# Altium PCB IMX6WBED.PcbDoc (part 6 of 10)
Units mil, origin at the board's own origin, x right, y up, seen from the top; angles counter-clockwise.
Board outline 3318.23 x 4815.16 mil, 6 copper layers (Top Layer, L2_GND_1, L3_INT_1, L6_INT_2, L7_PWR_2, Bottom Layer), stack 27.7 mil thick; 504 components, 400 nets, 2357 pads, 1199 vias.
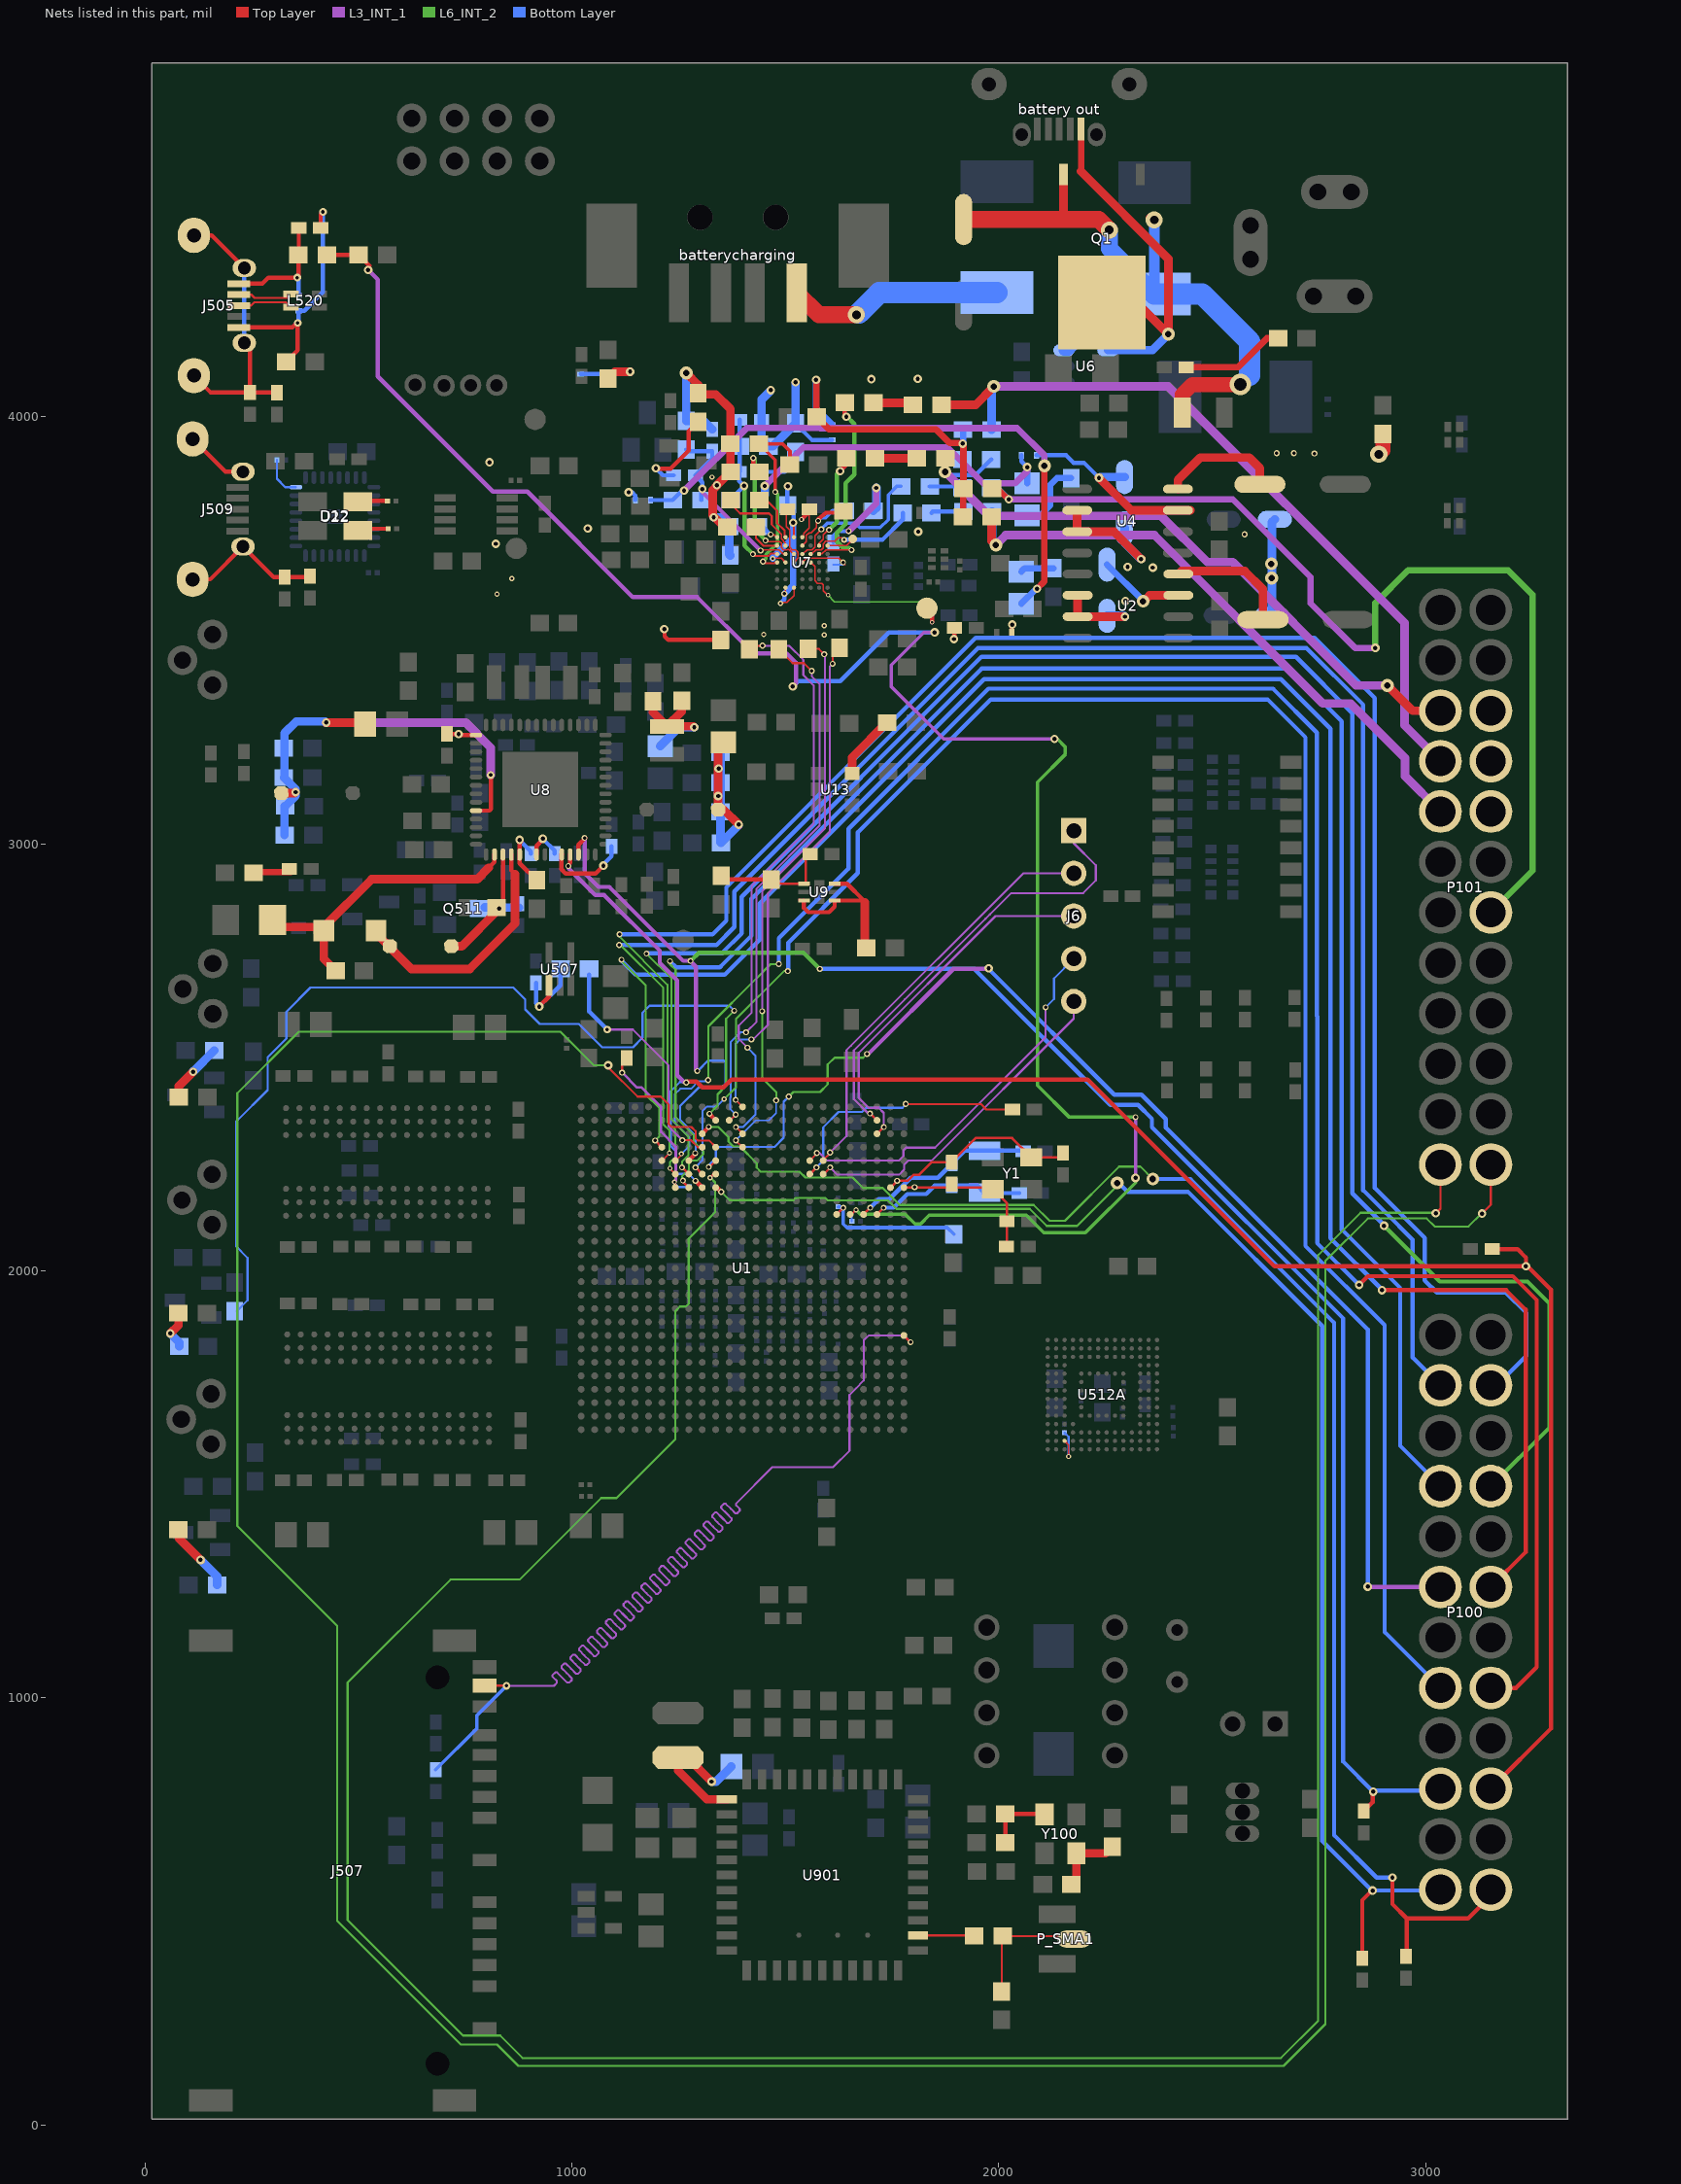
[diagram p10: the nets of this part, all layers, seen from the top]

## Via types
v1: diameter 14, hole 8, Top Layer to Bottom Layer, 296 vias
v2: diameter 14, hole 8, Top Layer to Bottom Layer, tented both sides, 244 vias
v3: diameter 20, hole 10, Top Layer to Bottom Layer, 221 vias
v4: diameter 20, hole 10, Top Layer to Bottom Layer, tented both sides, 112 vias
v5: diameter 18, hole 8, Top Layer to Bottom Layer, tented both sides, 74 vias
v6: diameter 12, hole 6, Top Layer to Bottom Layer, tented both sides, 60 vias
v7: diameter 16, hole 8, Top Layer to Bottom Layer, 59 vias
v8: diameter 30, hole 15, Top Layer to Bottom Layer, 33 vias
v9: diameter 40, hole 20, Top Layer to Bottom Layer, 16 vias
v10: diameter 30, hole 15, Top Layer to Bottom Layer, tented both sides, 16 vias
v11: diameter 18, hole 8, Top Layer to Bottom Layer, 16 vias
v12: diameter 12, hole 6, Top Layer to Bottom Layer, 13 vias
v13: diameter 16, hole 8, Top Layer to Bottom Layer, tented both sides, 8 vias
v14: diameter 80, hole 40, Top Layer to Bottom Layer, 5 vias
v15: diameter 14, hole 6, Top Layer to Bottom Layer, tented both sides, 4 vias
v16: diameter 50, hole 30, Top Layer to Bottom Layer, 3 vias
v17: diameter 16, hole 10, Top Layer to Bottom Layer, 3 vias
v18: diameter 25, hole 15, Top Layer to Bottom Layer, tented both sides, 3 vias
v19: diameter 35, hole 20, Top Layer to Bottom Layer, tented both sides, 3 vias
v20: diameter 10, hole 6, Top Layer to Bottom Layer, 3 vias
v21: diameter 18, hole 10, Top Layer to Bottom Layer, tented both sides, 2 vias
v22: diameter 80, hole 45, Top Layer to Bottom Layer, 1 vias
v23: diameter 40, hole 20, Top Layer to Bottom Layer, tented both sides, 1 vias
v24: diameter 11, hole 6, Top Layer to Bottom Layer, tented both sides, 1 vias
v25: diameter 13, hole 6, Top Layer to Bottom Layer, tented both sides, 1 vias
v26: diameter 14, hole 6, Top Layer to Bottom Layer, 1 vias

## Nets (pads, with @x,y where several pads share a name; then routed paths per layer and width w, separated by ;. In a path a pad name is that pad's centre, name@x,y a point inside that pad or via, vN(x,y) a via of type N, cw(c..) or ccw(c..) an arc to the next point about the centre after c; other vN are vias at no path point) (continued)
GND_ANALOG: C3.2 C4.2 C7.2 C8.2 C15.1 C17.1 C540.1 C541.1 C542.1 C543.1 C547.2 C548.2 C549.1 C640.1 L501.2 P101.6 P101.8 P101.10 R525.1 R529.1 R541.1 R542.1 R545.1 R552.1 R554.1 SHA7.2 TVS500.1 TVS501.1 TVS502.1 TVS503.1 TVS505.1 U2.7 U4.7 U7.B1 U7.B4 U7.C1 U7.C7 U7.D7 | length 3417.2
  Top Layer w3: v12@1469.91,3668.78 1490.31,3668.78 U7.B4@1500.15,3658.94 ; v12@1490.29,3565.04 1503.6,3565.04 1519.83,3581.27 U7.C1@1519.83,3599.9 ; v1@1499.91,3583.24 1500.15,3583.48 U7.B1@1500.15,3599.9 ; U7.D7@1539.51,3717.98 1542.47,3720.94 1542.47,3727.38 1554.99,3739.9 1554.99,3781.83 C640.1@1556.06,3782.9
  Top Layer w5: v4@1519.73,3744.84 1519.41,3744.52 1519.41,3736.96 1519.47,3736.9 1519.47,3718.34 U7.C7@1519.83,3717.98
  Top Layer w10: v3@1217.06,3501.71 1217.06,3485.8 1225.42,3477.44 C541.1@1348.47,3477.44 ; v6@1539.23,3759.47 v6(1537.31,3759.47) 1556.06,3778.22 C640.1@1556.06,3782.9 C640.1@1556.28,3782.68 ; v3@1895.66,3482.55 1895.88,3482.77 R554.1@1895.88,3505.9 ; TVS502.1@2030.47,3494.9 2030.47,3509.96 v3@2030.84,3510.33
  Top Layer w20: SHA7.2@1084.47,4089.44 1100.74,4105.71 v3@1135.28,4105.71 ; v8(1267.75,4102.44) 1295.47,4074.72 R552.1@1295.47,4055.36 1298.17,4052.66 1336.35,4052.66 1371.01,4018 C549.1@1371.01,3936.9 C17.1@1371.01,3871.9 ; v3@1329.64,3769.21 1329.64,3828.42 v3@1339.41,3838.19 ; v3@1333.16,3765.69 1356.95,3741.9 C547.2@1364.01,3741.9 ; v3@1339.4,3839.49 1371.01,3871.09 C17.1@1371.01,3871.9 ; C17.1@1372.01,3870.9 C17.1@1371.01,3871.9 ; v3(2234.53,3857.09) 2310.72,3780.9 U4.7@2419.47,3780.9 U4.7@2448.41,3780.9 ; v8@2339.73,3568.61 2353.02,3581.9 U2.7@2420.47,3581.9 2364.76,3581.9
  Top Layer w35: v9(2890.07,3912.16) 2899.47,3921.56 L501.2@2899.47,3959.44
  L3_INT_1 w15: v1(1648.27,3732.35) 1712.66,3796.74 v3(1712.66,3833.43)
  Bottom Layer w10: TVS505.1@1020.47,4099.9 1130.4,4099.9 v3(1136.21,4105.71) ; v3@1140.06,3823.76 1148.47,3815.35 TVS501.1@1148.47,3804.9 ; v12(1488.59,3563.12) 1497.41,3571.94 v1(1497.41,3585.61) ; v3@1504.35,3837.41 1504.01,3837.07 C543.1@1504.01,3793.9 1518.81,3779.1 v4@1518.81,3746.01 ; R525.1@1523.47,3984.36 1561.93,3945.9 TVS503.1@1609.47,3945.9 ; C540.1@1612.47,3706.49 1612.47,3720.81 1623.78,3732.12 v1@1647.89,3732.12 ; TVS500.1@2088.47,3909.9 2157.43,3909.9 2174.95,3892.38 2199.24,3892.38 v3(2234.53,3857.09) ; v3@2236.91,3858.52 v3@2237.29,3858.9
  Bottom Layer w15: v12(1469.91,3668.18) 1469.91,3669.61 1518,3717.7 v4(1518,3751.94) ; v1(1497.41,3585.61) 1518,3606.2 1518,3716.27 ; C4.2@2253.47,3653.9 2337.9,3569.47 v8(2337.9,3567.99)
  Bottom Layer w20: v8@1267.47,4097.47 R545.1@1267.47,3990.36 1308.6,3990.36 R541.1@1328.47,3970.49 ; v3(1331.95,3764.48) 1346.43,3764.48 C548.2@1368.01,3742.9 1368.01,3677.83 C542.1@1370.47,3675.36 ; v3@1464.41,4060.73 1444.06,4040.38 R542.1@1444.06,3992.9 1444.06,3946.77 R529.1@1459.93,3930.9 1470.01,3930.9 R525.1@1523.47,3984.36 1523.47,4078 v3@1523.52,4078.05 ; C15.1@1705.93,3779.9 1713,3786.97 v3@1713,3833.77 ; v3@2237.29,3858.9 C8.2@2294.47,3858.9 ; C3.2@2639.47,3534.9 2639.47,3752.9 C7.2@2646.47,3759.9
  other v1: 2575.62,3724.58 2739.35,3913.9 2651.01,3914.77 2691.24,3914.77
  other v3: 1894.96,3479.36 1216.03,3502.73 2031.09,3513.33 2296.73,3568.4 2360.6,3646.68 2301.62,3648.69 821.34,3702.53 1811.16,3730.95 1036.88,3738.13 1132.6,3823.07 1505.73,3837.63 1339.18,3839.71 806.51,3893.51 1465.43,4062.43 1523.86,4080.77 1701.23,4088.08 1809.9,4088.75
  other v8: 2639.27,3622.12 2638.35,3655.72
  other v12: 1591.02,3489.02 1449.13,3490.01 1590.6,3511 824.33,3584.48 859.28,3621.01 1328.04,3858.67
GREEN: R307.2 U1.R2 | length 2282.9
  Top Layer w10: v2(1321.97,2367.76) 1321.17,2367.76 U1.R2@1336.53,2352.4
  L6_INT_2 w5: v2@1321.17,2367.76 v2(1321.97,2367.76) 1340.86,2386.65 1340.86,2413.08 1360.99,2433.21 1360.99,2590.08 v1(1379.95,2609.04)
  Bottom Layer w5: R307.2@214.47,1905.44 239.75,1930.72 239.75,2030.3 213.51,2056.54 213.51,2349.96 286.94,2423.39 286.94,2500.15 330.8,2544.01 330.8,2606.61 387.42,2663.23 862.44,2663.23 890.41,2635.26 890.41,2612.03 924.63,2577.81 1016.21,2577.81 1070.54,2523.48 1142.89,2523.48 1165.37,2545.96 1165.37,2604.09 1181.86,2620.58 1368.41,2620.58 v1(1379.95,2609.04)
HPOUTL: C534.2 L505.1 R541.2 R545.2 U7.B5 | length 455.3
  Top Layer w3: v1@1442.32,3688.09 1476.5,3688.09 1484.69,3688.12 ; 1484.77,3688.21 1494.36,3678.62 U7.B5@1500.15,3678.62
  L3_INT_1 w10: v3@1305.74,3822.94 v1(1441.84,3686.84)
  Bottom Layer w10: R545.2@1267.47,3923.44 1271.6,3919.31 R541.2@1328.47,3919.31 1328.47,3902.31 C534.2@1289.06,3862.9 1305.27,3846.69 v3(1305.27,3830.87) 1302.93,3828.53 L505.1@1302.93,3804.9
HPOUTR: C519.2 L504.1 R529.2 R542.2 U7.A5 | length 432.4
  Top Layer w4.7: v1@1425.03,3677.65 1424.85,3677.47 1427.83,3674.49 1460.17,3674.49 1465.21,3679.53 1479.56,3679.53 U7.A5@1480.47,3678.62
  L6_INT_2 w10: v3@1402.68,3836.43 1403.87,3835.24 1403.87,3698.68 v1(1424.04,3678.51)
  Bottom Layer w10: L504.1@1372.01,3804.9 1372.01,3806.85 v3(1403.25,3838.09) 1391.88,3849.46 C519.2@1391.88,3870.9 1392.88,3871.9 R542.2@1392.88,3992.9
HX1_CLK: P100.4 U1.V6 | length 4685.6
  Top Layer w4.5: v6@1228.47,2238.9 1240.95,2226.42 U1.V6@1242.04,2226.42
  L6_INT_2 w4.7: v2(1111.47,2787.9) 1111.47,2781.9 1223.47,2669.9 1223.47,2348.9 1242.47,2329.9 1242.47,2266.9 1229.47,2253.9 v6(1229.47,2239.9)
  Bottom Layer w10: v2(1111.47,2787.9) 1329.47,2787.9 1361.47,2819.9 1361.47,2897.9 1945.57,3482 2402.77,3482 ; 2398.29,3482.58 2398.43,3482.44 2739.19,3482.44 2880.76,3340.87 2880.76,2194.05 2997.82,2076.99 2997.82,1977.29 3026.06,1949.05 3187.72,1949.05 3235.87,1900.9 3235.87,1801.1 3166.56,1731.79 P100.4@3152.58,1731.79
HX1_DATA: P100.3 U1.W5 | length 4368.4
  Top Layer w4.5: U1.W5@1210.54,2257.92 1210.54,2257.97 v6(1228.47,2275.9)
  L6_INT_2 w4.7: v2(1110.47,2762.9) 1113.47,2762.9 1214.01,2662.36 1214.01,2342.36 1228.47,2327.9 v6(1228.47,2275.9)
  Bottom Layer w10: v2@1114.47,2762.9 1338.47,2762.9 1380.47,2804.9 1380.47,2887.9 1951.09,3458.52 2720.58,3458.52 2853.46,3325.64 2853.46,2188.54 2903.57,2138.43 ; 2907.67,2134.33 2903.57,2138.43 ; P100.3@3034.47,1731.79 2969.28,1796.98 2969.28,2072.72 2903.57,2138.43
HX2_CLK: P100.8 U1.U6 | length 4788
  Top Layer w6: v2(1257.79,2242.17) U1.U6@1273.53,2226.42
  L6_INT_2 w4.7: v2(1174.47,2742.9) 1233.33,2684.04 1233.33,2354.04 1272.47,2314.9 1272.47,2269.9 1257.79,2255.22 v2(1257.79,2242.17)
  L6_INT_2 w10: v3(2902.43,2105.37) 3033.11,1974.69 3238.27,1974.69 3289.47,1923.49 3289.47,1632.46 P100.8@3152.58,1495.57
  Bottom Layer w10: v2@1176.47,2743.9 1351.47,2743.9 1397.47,2789.9 1397.47,2875.9 1959.27,3437.7 2695.78,3437.7 2828.29,3305.19 2828.29,2181.25 v3@2901.04,2108.5
HX2_DATA: P100.7 U1.U7 | length 4459.8
  Top Layer w6: v2(1259.83,2211.36) 1258.47,2211.36 1257.79,2210.67 U1.U7@1273.53,2194.92
  L6_INT_2 w4.7: v2(1229.47,2724.9) 1229.47,2717.9 1242.53,2704.84 1242.53,2359.84 1285.47,2316.9 1285.47,2301.9 1307.47,2279.9 1307.47,2273.95 ; v2(1259.83,2211.36) 1258.47,2211.36 1257.79,2210.67 1257.79,2221.1 1274.01,2237.32
  L6_INT_2 w5: 1274.01,2237.32 1274.01,2252.44 1279.47,2257.9 1292.56,2257.9 1307.47,2272.81 1307.47,2273.95
  Bottom Layer w10: v2(1229.47,2724.9) 1243.97,2710.4 1345.97,2710.4 1353.47,2717.9 1420.47,2784.88 1420.47,2870.9 1959.72,3410.15 2679.84,3410.15 2803.33,3286.66 2803.33,2096.42 2940.05,1959.7 2940.05,1589.99 P100.7@3034.47,1495.57
HX3_CLK: P100.12 U1.W4 | length 4953.8
  Top Layer w6: v2(1194.79,2305.16) U1.W4@1210.54,2289.41
  Top Layer w10: v3(2897.22,1954.46) 3188.47,1954.46 3234.01,1908.92 3234.01,1340.78 P100.12@3152.58,1259.35
  L6_INT_2 w4.7: v2(1115.7,2728.3) 1113.07,2728.3 1172.47,2668.9 1172.47,2412.9 1204.81,2380.56 1204.81,2315.18 v2(1194.79,2305.16)
  Bottom Layer w10: v2@1114.47,2727.9 1149.19,2693.18 1357.75,2693.18 1439.47,2774.9 1439.47,2859.9 1965.07,3385.5 2660.84,3385.5 2776.91,3269.43 2776.91,2076.33 v3@2897.21,1956.03
HX3_DATA: P100.11 U1.R5 | length 2982
  Top Layer w5: v1@1321.65,2243.04 U1.R5@1336.53,2257.92
  L3_INT_1 w10: v1(1691.09,2507.72) 1693.67,2507.72 1893.39,2707.44 v3@1974.64,2707.44 ; v3@2866.5,1260.38 2867.53,1259.35 P100.11@3034.47,1259.35
  L6_INT_2 w5: v1(1507.88,2407.85) 1518.72,2418.69 1581.17,2418.69 1599.01,2436.53 1599.01,2482.92 1615.09,2499 1682.04,2499 v1@1689.82,2506.78
  Bottom Layer w5: v1(1320.32,2243.04) 1320.32,2247.42 1336.94,2264.04 1336.94,2282.03 1345.14,2290.23 1474.68,2290.23 1495.91,2311.46 1495.91,2395.88 v1(1507.88,2407.85)
  Bottom Layer w10: v3@1975.11,2707.88 1975.11,2707.58 2270.55,2412.14 2334.3,2412.14 2391.23,2355.21 2391.23,2335.42 2829.27,1897.38 ; 2826.02,1900.63 2829.27,1897.38 ; v3(2864.05,1260.25) 2864.05,1862.6 2829.27,1897.38
  other v3: 1976.09,2708.53
HX4_CLK: P100.16 U1.V5 | length 5065.7
  Top Layer w4.5: U1.V5@1242.04,2257.92 1242.49,2257.92 v6@1258.47,2273.9
  Top Layer w10: v3(2843.76,1966.81) 2864.33,1987.38 3204.04,1987.38 3260.01,1931.41 3260.01,1071.42 3211.72,1023.13 P100.16@3152.58,1023.13
  L6_INT_2 w4.7: v2@1319.47,2444.9 1319.47,2572.36 1433.01,2685.9
  L6_INT_2 w5: 1433.02,2685.9 1464.95,2717.83 1484.4,2717.83 v2(1484.4,2718.56)
  Bottom Layer w4.7: v6(1256.47,2273.9) 1274.47,2291.9 1274.47,2312.9 1240.47,2346.9 1240.47,2413.37 1253.51,2426.41 1278.98,2426.41 1296.47,2443.9 1317.47,2443.9 1318.79,2445.22 v2(1318.79,2446.46)
  Bottom Layer w10: v2(1484.4,2718.56) 1484.4,2717.83 1484.47,2717.9 1484.47,2779.03 1647.47,2942.03 1647.47,3035.05 1975.65,3363.23 2642.15,3363.23 2744.85,3260.53 2744.85,2596.55 2745.76,2595.64 2745.76,2167.88 ; 2745.76,2160.6 2745.76,2167.88 ; v3@2841.48,1969.1 2745.76,2064.82 2745.76,2167.88
HX4_DATA: P100.15 U1.T6 | length 4554.1
  Top Layer w6: v2(1289.28,2242.17) U1.T6@1305.03,2226.42
  L6_INT_2 w4.7: v6(1356.47,2401.9) 1384.2,2429.63 1384.2,2589.59 1496.51,2701.9 v2(1505.47,2701.9)
  Bottom Layer w4.7: v2(1289.28,2242.17) 1305.47,2258.36 1305.47,2373.9 1316.47,2384.9 1339.47,2384.9 v6(1356.47,2401.9)
  Bottom Layer w10: v2@1506.47,2701.9 1506.47,2768.11 1669.59,2931.23 1669.59,3026.64 1980.99,3338.04 2629.41,3338.04 2718.19,3249.26 2718.19,2058.14 2903.6,1872.73 2903.6,1154 P100.15@3034.47,1023.13
I2C2_SCL: P100.19 R170.1 U1.U5 U8.54 | length 4387.1
  Top Layer w10: U8.54@1015.19,2974.9 1015.19,2997.62 v2@1030.47,3012.9 ; U1.U5@1273.53,2257.96 1289.47,2273.9 1288.65,2274.72 v2(1288.65,2275.65) ; R170.1@2854.47,734.49 2875.63,755.65 v3@2875.63,783.17
  L3_INT_1 w10: v2(1029.47,3013.9) 1029.47,2930.9 1061.47,2898.9 1087.47,2898.9 1260.47,2725.9 v2@1276.47,2725.9 ; v2(1277.47,2725.9) v2@1276.47,2725.9 ; v2@1290.47,2471.9 1290.47,2711.9 v2@1276.47,2725.9
  L6_INT_2 w10: v2@1278.47,2725.9 1297.47,2744.9 1542.47,2744.9 v2(1580.47,2706.9)
  Bottom Layer w5: v2(1288.65,2275.65) 1288.65,2274.72 1289.47,2273.9 1289.47,2316.9 1253.47,2352.9 1253.47,2385.9 1296.47,2428.9 1349.47,2428.9 1359.47,2438.9 1359.47,2487.9 1355.47,2491.9 1318.47,2491.9 1295.47,2468.9 v2@1289.47,2468.9
  Bottom Layer w10: v2(1580.47,2706.9) 1942.67,2706.9 2260.96,2388.61 2325.83,2388.61 2358.64,2355.8 2358.64,2336.35 2806.69,1888.3 2806.69,850.35 2874.39,782.65 3030.21,782.65 P100.19@3034.47,786.91
  other v2: 1293.47,2467.9
  other v3: 2877.2,780.02
I2C2_SDA: P100.20 R169.1 U1.T7 U8.53 | length 4526
  Top Layer w10: 995.51,2954.94 U8.53@995.51,2974.9 ; v2@1271.47,2442.9 1291.47,2442.9 1305.04,2429.33 1354.74,2429.33 1373.37,2447.96 2208.07,2447.96 2392.13,2263.9 2392.21,2263.9 2645.56,2010.55 3234.33,2010.55 v3(3234.64,2010.86) ; v2(1289.28,2210.67) U1.T7@1305.03,2194.92 ; P100.20@3152.58,786.91 3293.23,927.56 3293.23,1955.99 v3@3239.53,2009.69 ; R169.1@3156.06,2050.9 3214.82,2050.9 3234.98,2030.74 3234.98,2011.06 v3@3233.61,2009.69
  L3_INT_1 w10: v2@991.47,2942.9 1054.47,2879.9 1075.47,2879.9 1205.47,2749.9 1205.47,2720.9 1246.47,2679.9 1246.47,2457.9 v2@1262.47,2441.9
  Bottom Layer w5: v2@1262.47,2441.9 1252.91,2441.9 1231.17,2420.16 1231.17,2292.2 1242.47,2280.9 1242.47,2232.9 1248.47,2226.9 1273.05,2226.9 v2(1289.28,2210.67)
  other v2: 1267.47,2440.9 991.47,2947.9
I2C3_SCL: P100.23 R179.1 U1.R7 | length 3374.8
  Top Layer w10: U1.R7@1336.53,2194.92 1339.45,2194.92 v2(1349.47,2184.9) ; R179.1@2851.47,389.49 2851.47,525.87 v3@2875.4,549.8
  L6_INT_2 w5: v2(1349.47,2184.9) 1368.94,2165.43 1519,2165.43 1524.13,2170.56 1592.81,2170.56 1598.47,2164.9 1739.81,2164.9 1759.76,2144.95 1804.4,2144.95 1804.44,2144.99 2072.23,2144.99 2112.32,2104.9 2183.29,2104.9 2270.47,2192.08 2270.47,2215.9 2277.13,2209.24 v10(2277.13,2205.51)
  Bottom Layer w10: v10(2277.13,2205.51) 2277.13,2209.24 2301.16,2185.21 2442.73,2185.21 2757.4,1870.54 2757.4,664.77 2873.43,548.74 3032.52,548.74 P100.23@3034.47,550.69
  other v3: 2875.4,548.36
I2C3_SDA: P100.24 R178.1 U1.T3 | length 3605.7
  Top Layer w10: U1.T3@1305.03,2320.91 1305.03,2321.46 v2(1320.47,2336.9) ; v3(2921.98,578.92) 2921.98,516.78 2955.32,483.44 ; R178.1@2953.47,394.49 2955.32,396.34 2955.32,483.44 ; P100.24@3152.58,550.69 3152.58,536.72 3099.3,483.44 2955.32,483.44
  L6_INT_2 w5: v2(1320.47,2336.9) 1342.39,2336.9 1366.47,2312.83 1366.47,2302.66 1377.97,2291.16 1393.31,2291.16 1432.47,2252 1432.47,2241.6 1441.88,2232.19 1532.82,2232.19 1546.86,2218.15 1657.33,2218.15 1681.58,2193.9 1728.01,2193.9 1767.72,2154.19 2081.34,2154.19 2118.63,2116.9 2154.67,2116.9 2281.67,2243.9 2331.47,2243.9 v10(2360.47,2214.9)
  Bottom Layer w10: v10(2360.47,2214.9) 2448.71,2214.9 2785.32,1878.29 2785.32,678.18 2884.7,578.8 v3@2923.03,578.8
JTAG_MOD: R593.2 U1.H6 | length 612.5
  Top Layer w5: v2(1781.74,2390.86) 1781.74,2390.63 1782.47,2389.9 1782.71,2390.14 1958.23,2390.14 1970.47,2377.9 R593.2@2031.88,2377.9
  Top Layer w6: U1.H6@1557,2226.42 v2(1572.75,2242.17)
  Bottom Layer w5: v2(1572.75,2242.17) 1588.59,2258.01 ; 1584.74,2254.16 1588.59,2258.01 ; 1588.59,2281.11 1588.59,2292.12 ; v2(1781.74,2390.86) 1781.74,2390.63 1782.47,2389.9 1774.07,2381.5 1689.07,2381.5 1679.6,2372.03 1624.6,2372.03 1588.47,2335.9 1588.47,2301.1 1588.59,2300.98 1588.59,2292.12 ; 1588.59,2258.01 1588.59,2292.12
JTAG_NTRST: J6.1 U1.C2 | length 1029.5
  Top Layer w5: v1(1698.3,2368.49) 1698.39,2368.49 U1.C2@1714.48,2352.4
  L3_INT_1 w5: v1(1698.3,2368.49) 1693.65,2368.49 1660.19,2401.95 1660.19,2516.31 1779.7,2635.82 1780.1,2635.82 1968.68,2824.4 1968.68,2824.52 1978.85,2834.69 1978.97,2834.69 2028.74,2884.46 2197.34,2884.46 2227.04,2914.16 2227.04,2949.8 2175.47,3001.37
MIC2_IN2L: L750.2 P101.14 R804.2 | length 2451.8
  Top Layer w15: R804.2@1983.93,3831.9 1996.8,3831.9 v3@2021.02,3807.68
  L3_INT_1 w15: v3(2023.27,3806.49) 2547.84,3806.49 2729.99,3624.34 2729.99,3563.22 2834.42,3458.79 v3(2881.95,3458.79)
  L6_INT_2 w15: v3(2881.95,3458.79) 2881.95,3563.91 2958.64,3640.6 3192.79,3640.6 3250.4,3582.99 3250.4,2937.06 P101.14@3152.58,2839.24
  Bottom Layer w15: L750.2@1981.93,3833.9 1995.86,3833.9 v3(2023.27,3806.49)
MIC2_IN2R: L850.2 P101.9 R803.2 | length 1494
  Top Layer w20: R803.2@1982.93,3765.9 1982.93,3709.45 v8@1990.83,3701.55
  L3_INT_1 w20: v8(1992.82,3699.74) 2016.21,3723.13 2364.31,3723.13 2758.69,3328.75 2823.74,3328.75 2951.25,3201.24 2951.25,3158.68 P101.9@3034.47,3075.46
  Bottom Layer w20: L850.2@1983.93,3777.9 1983.93,3708.63 v8(1992.82,3699.74)
MIC2_L: C882.2 U7.D5 | length 355
  Top Layer w3: U7.D5@1539.51,3678.62 1540.63,3678.62 1550.48,3688.47 1562.79,3688.47 1569.17,3694.84 1569.17,3721.71 1574.93,3727.48 1575.02,3727.48 1583.02,3735.48 v1@1583.02,3735.87
  Bottom Layer w8: v1(1584.17,3736.46) 1584.17,3737.07 1598.24,3751.14 1663.13,3751.14 1674.01,3740.26 1721.93,3740.26 1740.71,3759.04 1740.71,3817.13 1760.48,3836.9 C882.2@1771.01,3836.9
MIC2_R: C881.2 U7.E5 | length 279.1
  Top Layer w3: U7.E5@1559.19,3678.62 1561.69,3678.62 1571.4,3688.33 1584.4,3688.33 1588.61,3692.54 1588.61,3702.45 1594.54,3708.38 1605.09,3708.38 1605.14,3708.43 1615.55,3708.43 1623.73,3716.61 1632.67,3716.61 v26(1637.5,3711.78) ; v26@1633.7,3708.38 v26@1636.4,3712.34
  Bottom Layer w10: v26(1637.5,3711.78) 1726.97,3711.78 1775.01,3759.82 C881.2@1775.01,3774.9
MIC_IN3L: L666.2 P101.7 R802.2 | length 1791.7
  Top Layer w20: L666.2@1865.93,4027.9 1945.56,4027.9 v8@1986.99,4069.33
  L3_INT_1 w20: v8(1988.21,4071.03) 2396.75,4071.03 2950.3,3517.48 2950.3,3277.74 P101.7@3034.47,3193.57
  Bottom Layer w20: R802.2@1982.93,3969.9 1982.93,4065.75 v8(1988.21,4071.03)
MIC_IN3R: L610.2 P101.5 R801.2 | length 1517.9
  Top Layer w20: v8(2910.15,3370.92) 2969.39,3311.68 P101.5@3034.47,3311.68
  L3_INT_1 w20: v8(1873.97,3870.97) 1976.83,3768.11 2379.99,3768.11 2488.21,3659.89 2547.67,3659.89 2836.64,3370.92 v8(2910.15,3370.92)
  Bottom Layer w10: v8(1873.97,3870.97) 1880.97,3863.97 1946,3863.97 R801.2@1981.93,3899.9
MIC_L: C889.2 U7.F5 | length 473.9
  Top Layer w3: U7.F5@1578.87,3678.62 1584.72,3678.62 1594.9,3688.8 1602.49,3688.8 1653.98,3688.8 v2(1654.88,3687.9)
  Top Layer w10: C889.2@1639.01,4032.9 1639.01,4003.48 v3(1642.52,3999.97)
  L6_INT_2 w10: v3@1643.72,4000.47 1661.27,3982.92 1661.27,3864.72 1641.13,3844.58 1641.13,3749.01 1620.19,3728.07 1620.19,3707.88 1635.13,3692.94 1649.1,3692.94 v2@1654.02,3688.02
MIC_R: C888.2 U7.F6 | length 220.3
  Top Layer w3: U7.F6@1578.87,3698.3 1578.87,3703.3 1588.47,3712.9 1588.47,3724 1599.74,3735.27 v1(1602.17,3735.27)
  Top Layer w10: v3(1628.01,3872.81) 1643.01,3887.81 C888.2@1643.01,3902.9
  L6_INT_2 w10: v1@1603.57,3736.39 1620.29,3753.12 1620.29,3865.41
MICBIAS: L507.2 R801.1 R802.1 R803.1 R804.1 TVS503.2 | length 814.6
  Top Layer w15: v3@1572.48,4085.62 1572.93,4085.17 L507.2@1572.93,3999.9 1602.55,3970.28 1853.01,3970.28 1884.16,3939.13 v3@1912.71,3939.13 ; v3(1915.15,3937.14) 1917.01,3935.28 R804.1@1917.01,3831.9 1916.01,3830.9 R803.1@1916.01,3765.9
  Bottom Layer w15: v3(1571.81,4086.64) 1571.81,4018.99 TVS503.2@1609.47,3981.33 ; R801.1@1915.01,3899.9 1916.01,3900.9 R802.1@1916.01,3969.9
MLX90614_SCL: P101.23 U1.R6 | length 6911.9
  Top Layer w5: v3(3023.44,2134.51) 3034.47,2145.54 P101.23@3034.47,2248.69
  Top Layer w6: v6(1323.25,2217.93) 1331.74,2226.42 U1.R6@1336.53,2226.42
  L6_INT_2 w4.5: 1241.97,1605.4 1241.97,1896.31
  L6_INT_2 w5: 1240.8,1604.24 1104.47,1467.9 1068.57,1467.9 877.52,1276.85 715.42,1276.85 474.18,1035.61 474.18,479.19 744.47,208.9 831.47,208.9 884.09,156.28 2660.5,156.28 2748.03,243.81 2748.03,2036.61 2847.34,2135.92 v3@3023.44,2135.92 ; 1241.97,1896.31 1241.97,1905.28 1252.9,1916.21 ; 1253.8,1915.98 1266.81,1915.98 1273.45,1922.62 1273.45,1999.81 ; 1273.47,1999.83 1273.47,2074.9 1335.47,2136.9 1335.47,2207.13 1324.67,2217.93 v6(1323.25,2217.93)
MLX90614_SDA: P101.24 U1.R4 | length 8202.9
  Top Layer w5: v4(1084.69,2481.27) 1084.69,2476.83 1153.62,2407.9 1207.76,2407.9 1226.47,2389.19 1226.47,2343.9 1233.47,2336.9 1279.47,2336.9 1289.47,2326.9 1289.47,2309.9 1294.21,2305.16 1321.27,2305.16 U1.R4@1336.53,2289.9 ; v3(3131.86,2133.95) 3152.58,2154.67 P101.24@3152.58,2248.69
  Top Layer w6: U1.R4@1336.53,2289.41 U1.R4@1336.53,2289.9
  L6_INT_2 w5: v4(1084.69,2481.27) 1051.1,2481.27 972.47,2559.9 359.68,2559.9 215.77,2415.99 215.77,1402.43 449.88,1168.32 449.88,477.49 739.47,187.9 824.47,187.9 874.51,137.86 2666.97,137.86 2764.86,235.75 2764.86,2022.81 2864.52,2122.47 3002.3,2122.47 3021.12,2103.65 3100.17,2103.65 v3@3131.79,2135.27
NetAUD3_RXD_1: AUD3_RXD.1 U1.N3 | length 1384.3
  Top Layer w4.7: v1@1385.59,2335.22 1385.59,2334.84 U1.N3@1399.52,2320.91 ; AUD3_RXD.1@1415.47,3455.44 1423.97,3463.94 v1(1446.45,3463.94)
  L3_INT_1 w4.7: v1(1411.03,2522.59) 1390.56,2543.06 1390.56,2574.23 1420.26,2603.93 1420.26,2900.84 1566.2,3046.78 1566.2,3370.91 1541.91,3395.2 1541.91,3430.9 1509.28,3463.53 v1@1444.82,3463.53
  Bottom Layer w4.7: v1(1384.18,2336.62) 1400.82,2336.62 1429.38,2365.18 1429.38,2503.99 1415.28,2518.09 v1@1415.28,2521.84
NetAUD3_TXC_1: AUD3_TXC.1 U1.N1 | length 1200.1
  Top Layer w4.7: v1@1383.72,2399.7 U1.N1@1399.52,2383.9 ; v1@1611.07,3421.58 1611.07,3444.04 AUD3_TXC.1@1626.47,3459.44
  L3_INT_1 w4.7: v1(1419.97,2541.9) 1424.94,2541.9 1458.82,2575.78 1458.82,2883.35 1604.28,3028.81 1604.28,3415.36 v1(1610.5,3421.58)
  Bottom Layer w4.7: v1(1383.14,2400.41) 1383.14,2530.96 1393.95,2541.78 v1@1420.09,2541.78
NetAUD3_TXD_1: AUD3_TXD.1 U1.P2 | length 1269.6
  Top Layer w4.7: U1.P2@1368.02,2352.4 1369.92,2352.4 v1@1383.28,2365.76 ; AUD3_TXD.1@1484.47,3461.48 AUD3_TXD.1@1484.47,3455.44 1516.75,3423.16 1543.2,3423.16 1561.64,3404.72 v1(1561.56,3404.72)
  L3_INT_1 w4.7: v1@1407.53,2559.27 v1(1407.53,2558.61) 1432.37,2583.45 1432.37,2894.88 1579.77,3042.28 1579.77,3374.5 1561.52,3392.75 v1@1561.52,3403.32
  Bottom Layer w4.7: 1370.79,2405.53 1370.79,2378.4 v1(1383.43,2365.76) ; 1371.35,2406.09 1371.35,2535.54 1394.42,2558.61 v1(1407.53,2558.61)
NetAUD3_TXFS_1: AUD3_TXFS.1 U1.N4 | length 1333.7
  Top Layer w3: v1@1384.03,2304.83 1384.1,2304.83 U1.N4@1399.52,2289.41
  Top Layer w4.7: AUD3_TXFS.1@1553.47,3456.44 1578.24,3456.44 v1(1590.76,3443.92)
  L3_INT_1 w4.7: v1(1445.66,2607.94) 1445.66,2889.07 1592.51,3035.92 1592.51,3440.22 1590.3,3442.43 v1@1590.57,3442.7
  L6_INT_2 w4.7: v1@1445.72,2607.55 1445.72,2451.22 1478.32,2418.62 v1(1478.32,2399.08)
  Bottom Layer w3: v1(1384.17,2305.52) 1430.59,2351.94 1461.26,2351.94 1478.24,2368.92 v1@1478.24,2399.34
"Netbattery out_1": "battery out.1" Q1.D U6.1 | length 913
  Top Layer w15: 2192.47,4574.72 2192.47,4673.9 ; Q1.D@2241.47,4267.9 Q1.D@2322.68,4267.9
  Top Layer w20: 2192.47,4574.72 2396.96,4370.23 v8(2396.96,4193.62) Q1.D@2322.68,4267.9
  Bottom Layer w20: U6.1@2255.47,4155.9 2359.77,4155.9 v8@2400.4,4196.53
Netbatterycharging_1: batterycharging.1 D4.B | length 503.9
  Top Layer w40: batterycharging.1@1526.27,4290.61 1578.09,4238.79 v9(1666.23,4238.79)
  Bottom Layer w50: v9@1672.68,4243.34 1720.24,4290.9 D4.B@1995.47,4290.9
NetC1_1: C1.1 U2.8 | length 290.1
  Top Layer w20: U2.8@2420.47,3631.9 2427.47,3638.9 2576.07,3638.9 2618.47,3596.5 C1.1@2618.47,3524.9
NetC2_1: C2.1 R2.2 | length 78.3
  Bottom Layer w15: C2.1@2052.47,3637.3 2060.53,3645.36 R2.2@2127.47,3645.36
NetC2_2: C2.2 L505.2 TVS501.2 | length 1395.6
  Top Layer w15: v3(2089.55,3597.36) 2106.2,3614.01 2106.2,3888.73 v8@2105.84,3889.09
  L3_INT_1 w15: v3(1262.51,3826.96) 1409.13,3973.58 1581.84,3973.58 1582.03,3973.39 2042.8,3973.39 2106.81,3909.38 v8(2106.81,3885.19)
  Bottom Layer w10: TVS501.2@1183.9,3804.9 L505.2@1236.01,3804.9 1261.41,3830.3 v3@1261.75,3830.3
  Bottom Layer w15: C2.2@2052.47,3562.5 2087.33,3597.36 v3(2089.55,3597.36) v3@2088.41,3597.36
NetC4_1: C4.1 U2.2 U2.3 | length 202.1
  Top Layer w20: U2.2@2184.47,3581.9 U2.3@2184.47,3531.9 2292.83,3531.9 v3@2293.47,3532.54
  Bottom Layer w20: C4.1@2253.47,3533.9 2293.2,3533.9 v3(2295.39,3531.71)
NetC5_1: C5.1 U4.8 | length 283.2
  Top Layer w20: U4.8@2419.47,3830.9 2419.47,3852.42 2471.7,3904.65 2586.38,3904.65 2611.47,3879.56 C5.1@2611.47,3841.9
NetC6_1: C6.1 R5.2 | length 167.1
  Bottom Layer w15: C6.1@2066.47,3769.5 2097.18,3769.5 2120.47,3792.79 2120.47,3840.76 2136.07,3856.36 R5.2@2169.47,3856.36
NetC6_2: C6.2 L504.2 TVS500.2 | length 812.2
  L3_INT_1 w15: v3(1451.4,3837.86) 1541.85,3928.31 1879.19,3928.31 1962.96,3844.54 2038.53,3844.54 2066.23,3872.24 v3(2066.23,3882.19)
  Bottom Layer w10: TVS500.2@2053.04,3909.9 2053.04,3895.38 v3(2066.23,3882.19)
  Bottom Layer w15: C6.2@2066.47,3844.3 v3@2066.47,3879.06
  Bottom Layer w20: L504.2@1438.93,3804.9 1451.8,3817.77 v3@1451.8,3835.43
NetC8_1: C8.1 U4.2 U4.3 | length 314.5
  Top Layer w20: U4.2@2183.47,3780.9 2183.47,3731.03 2269.51,3731.03 v3@2333.33,3667.21
  Bottom Layer w20: C8.1@2294.47,3738.9 2294.47,3705.55 v3(2333.33,3666.69)
NetC9_1: C9.1 D3.B F500.1 Q1.S U6.6 | length 1578.8
  Top Layer w20: Q1.S@2151.55,4567.9 2151.55,4462.59 2152.24,4461.9 ; v9@2354.14,4465.21 v9@2364.04,4465.21 ; v9@2363.73,4464.9 v9@2364.04,4465.21 ; v9(2364.04,4461.12) v9@2364.04,4465.21 ; v9@2364.55,4465.72 v9@2364.04,4465.21
  Top Layer w35: F500.1@2429.47,4009.9 2429.47,4051.94 2453.22,4075.69 v16@2554.78,4075.69
  Top Layer w40: C9.1@1917.47,4461.9 2152.24,4461.9 2234.31,4461.9 v9(2258.68,4437.53)
  Bottom Layer w25: U6.6@2152.47,4155.9 2162.45,4155.9 D3.B@2294.45,4287.9 ; v9(2364.04,4461.12) 2364.47,4460.69 D3.B@2364.47,4287.9
  Bottom Layer w30: D3.B@2347,4287.9 D3.B@2364.47,4287.9
  Bottom Layer w40: v9(2258.68,4437.53) 2258.68,4393.69 D3.B@2364.47,4287.9
  Bottom Layer w50: D3.B@2364.47,4287.9 2475.69,4287.9 2587.33,4176.26 2587.33,4097.5
  other v16: 2565.9,4076.07
NetC15_2: C15.2 L506.2 U7.D6 | length 204.4
  Top Layer w3: U7.D6@1539.51,3698.3 1549.01,3707.8 1549.01,3721.92 1555.67,3728.58 1560.17,3728.58 1572.67,3741.08 1572.67,3752.15 v2(1576.62,3756.1)
  Top Layer w10: v2@1577.94,3757.23 1577.15,3756.51 1577.15,3759.75 1595.72,3775.44 L506.2@1623.47,3775.44
  Bottom Layer w8: v2(1576.62,3756.1) 1583.78,3763.26 1593.83,3763.26 1610.47,3779.9
  Bottom Layer w10: 1610.47,3779.9 C15.2@1639.01,3779.9
NetC17_2: C17.2 U7.C5 | length 325.5
  Top Layer w3: v1@1456.05,3707.8 1486.5,3707.8 1490.47,3703.83 1490.47,3693.9 1495.57,3688.8 1504.08,3688.8 ; 1504.18,3688.9 1507.31,3688.9 1517.59,3678.62 U7.C5@1519.83,3678.62
  Top Layer w10: C17.2@1424.58,3864.62 v1(1424.58,3903.37)
  L6_INT_2 w10: v1(1424.58,3903.37) 1428.34,3899.61 1428.34,3860.17 1428.33,3735.59 v1(1453.63,3710.29)
NetC18_1: C18.1 U7.B6 | length 201.6
  Top Layer w3: 1485.29,3730.47 1490.65,3725.11 1490.65,3714.05 1500.15,3704.55 U7.B6@1500.15,3698.3
  Top Layer w5: C18.1@1364.01,3803.9 1394.14,3773.77 1461.67,3773.77 1467.99,3767.45 1467.99,3747.77 1485.29,3730.47
NetC18_2: C18.2 U7.B7 | length 129.6
  Top Layer w4.7: C18.2@1430.93,3803.9 1456.48,3803.9 1480.46,3779.92 1480.46,3750.91 1498.22,3733.15 1498.22,3719.91 U7.B7@1500.15,3717.98
NetC24_1: C24.1 C565.2 U8.29 | length 100.3
  Top Layer w10: C565.2@708.06,3256.9 v4(734.47,3256.9) v4@738.47,3256.9 ; v4@736.56,3254.8 U8.29@775.19,3254.8
  Bottom Layer w10: C24.1@707.47,3257.49 733.88,3257.49 v4(734.47,3256.9) v4@738.47,3256.9
NetC27_2: C27.2 U512A.C2 | length 98.7
  Top Layer w3: U512A.C2@2153.84,1601.59 2163.47,1591.95 v6@2163.47,1566.9
  Bottom Layer w5: C27.2@2153.84,1620.95 2163.47,1611.33 v6(2163.47,1564.9)
NetC31_2: C31.2 D9.2 SH15.1 U8.44 | length 705.8
  Top Layer w10: 804.61,2943.92 818.39,2957.71 U8.44@818.39,2974.9
  Top Layer w20: C31.2@298.59,2804.9 418.47,2804.9 530.47,2916.9 777.79,2916.9 804.61,2943.71 804.61,2943.92 ; D9.2@418.47,2796.9 418.47,2730.44 SH15.1@446.01,2702.9
NetC32_1: C32.1 U9.1 U9.3 U9.6 | length 380.8
  Top Layer w6: U9.6@1532.47,2869.21 U9.6@1533.47,2868.21
  Top Layer w10: U9.6@1543.47,2867.21 1543.47,2849.9 1553.47,2839.9 1602.47,2839.9 1615.35,2852.78 U9.1@1615.35,2867.21 1683.7,2867.21 ; U9.3@1615.35,2906.59 1644.32,2906.59 1683.7,2867.21 ; 1686.01,2864.9 1683.7,2867.21
  Top Layer w20: C32.1@1686.01,2752.9 1686.01,2862.9
NetC33_2: C33.2 R35.1 SH3V0.2 U9.4 | length 264.7
  Top Layer w6: C33.2@1466.47,2916.36 1476.24,2906.59 U9.4@1543.47,2906.59 ; U9.4@1543.47,2908.59 1547.47,2908.59 1547.47,2965.49 R35.1@1557.88,2975.9
  Top Layer w10: SH3V0.2@1358.47,2916.36 C33.2@1466.47,2916.36
NetC51_2: C51.2 R75.2 U1.B7 Y1.3 | length 464.6
  Top Layer w6: U1.B7@1745.97,2194.92 v2(1761.72,2210.67) ; v2@1763.95,2212.9 v2(1761.72,2210.67) ; C51.2@2140.68,2265.7 Y1.3@2076.03,2265.7 2030.83,2310.9 1945.88,2310.9 R75.2@1889.47,2254.49 1843.06,2254.49 1813.31,2224.74 1800.31,2224.74 1786.24,2210.67 v2(1761.72,2210.67)
NetC55_2: C55.2 R75.1 R216.2 U1.A7 Y1.1 | length 352.8
  Top Layer w6: U1.A7@1777.47,2194.92 Y1.1@1981.45,2194.92 ; v2(1802.47,2195.9) v2@1802.47,2197.9 ; Y1.1@1985.47,2190.9 2018.88,2157.49 C55.2@2018.88,2115.9 R216.2@2018.88,2057.9
NetC61_2: C61.2 C642.1 L15.1 U1.E9 | length 4733.8
  Top Layer w4.7: U1.E9@1651.49,2131.93 1654.5,2131.93 v6(1665.47,2142.9)
  Top Layer w10: L15.1@425.93,4378.9 C61.2@500.01,4378.9 525.47,4353.44
  L3_INT_1 w8: v3@1849.48,3494.66 1824.4,3494.66 1748.02,3418.28 1748.02,3367.83 1870.47,3245.38 v3(2130.25,3245.38) ; v3(2319.97,2217.33) v1@2319.97,2359.53
  L3_INT_1 w10: v4(522.47,4343.9) 544.96,4321.41 544.96,4094.58 814.85,3824.69 895.38,3824.69 1142.49,3577.58 1293.12,3577.58 1424.42,3446.28 1502.34,3446.28 1524.83,3423.79 1524.83,3376.39 v3@1522.87,3374.42
  L6_INT_2 w8: v6(1665.47,2142.9) 1676.42,2131.95 1746.01,2131.95 1781.25,2131.96 1803.37,2109.84 1816.65,2109.84 1836.69,2129.88 2064.6,2129.88 2105.41,2089.07 2202.56,2089.07 2320.14,2206.65 v3@2320.14,2216 ; v3(2130.25,3245.38) 2136.81,3245.38 2155.82,3226.37 2155.82,3209.73 2090.74,3144.65 2090.74,2433.74 2164.95,2359.53 v1(2320.07,2359.53)
  Bottom Layer w4.5: C642.1@1655.47,2115.9 1655.47,2132.9 v6(1665.47,2142.9)
  Bottom Layer w10: v3(1517.11,3368.34) 1530.04,3381.27 1572.48,3381.27 1572.75,3381 1628.63,3381 1742.43,3494.8 v3@1848.54,3494.8
  other v3: 1849.48,3495.16
NetC66_1: C66.1 J505.5 L519.2 TVS1.2 | length 577.1
  Top Layer w10: J505.5@219.47,4209.54 345.11,4209.54 v5@357.47,4221.9 ; L519.2@330.01,4128.9 357.47,4156.36 v5(357.47,4219.9) ; C66.1@411.06,4441.9 411.06,4474.49 v5(416.47,4479.9)
  Bottom Layer w10: v5(357.47,4219.9) 359.47,4221.9 TVS1.2@359.47,4248.47 373.04,4248.47 416.47,4291.9 v5@416.47,4478.9
NetC66_2: C66.2 J505.1 L15.2 TVS1.1 | length 304.5
  Top Layer w10: J505.1@219.47,4311.9 274.47,4311.9 288.47,4325.9 v5(356.47,4325.9) ; v5@357.47,4325.9 v5(356.47,4325.9) ; C66.2@359.88,4441.9 359.88,4379.77 L15.2@359.01,4378.9 359.01,4328.44 v5(356.47,4325.9)
  Bottom Layer w10: v5(356.47,4325.9) 359.47,4322.9 TVS1.1@359.47,4283.9
NetC126_1: C126.1 U22.16 | length 96.9
  Bottom Layer w5: C126.1@308.47,3898.9 308.47,3854.9 328.17,3835.2 U22.16@353.17,3835.2
NetC200_1: C200.1 U13.6 | length 152.9
  Top Layer w20: U13.6@1656.21,3164.9 1656.21,3202.1 C200.1@1738.01,3283.9
NetC504_1: C504.1 U1.T4 | length 568.1
  Top Layer w4.7: v2(1258.47,2305.9) 1278.47,2305.9 1294.96,2289.41 U1.T4@1305.03,2289.41
  L3_INT_1 w4.7: v5(1082.47,2564.9) 1142.47,2564.9 1226.47,2480.9 1226.47,2337.9 v2(1258.47,2305.9) ; v2@1257.47,2304.9 v2@1257.47,2305.9
  Bottom Layer w10: C504.1@1039.93,2693.9 1039.93,2607.44 v5(1082.47,2564.9)
NetC504_2: C504.2 R19.1 U507.1 | length 226.5
  Top Layer w10: v3@923.43,2619.3 946.47,2642.34 U507.1@946.47,2668.9
  Bottom Layer w10: R19.1@915.47,2674.31 915.47,2626.65 v3(923.29,2618.83) 973.01,2668.55 C504.2@973.01,2706.9
NetC519_1: C519.1 R525.2 | length 112.2
  Bottom Layer w10: C519.1@1443.06,3870.9 1498.33,3870.9 1523.47,3896.04 R525.2@1523.47,3917.44
NetC534_1: C534.1 R552.2 | length 220.1
  Top Layer w10: v3@1195.93,3878.21 1230.74,3878.21 1273.38,3920.85 1273.38,3966.35 R552.2@1295.47,3988.44
  Bottom Layer w10: v3(1196.42,3879.29) 1212.81,3862.9 C534.1@1237.88,3862.9
NetC540_2: C540.2 U7.D4 | length 148.2
  Top Layer w3: U7.D4@1539.51,3658.94 1549.47,3668.9 1624.96,3668.9 1639.88,3653.98 1639.04,3653.14 1639.04,3652.57 1635.98,3655.63 1635.98,3659.16 v2(1634.93,3659.16)
  Bottom Layer w4.7: C540.2@1611.66,3654.06 v2@1638.49,3654.06
NetC547_1: C547.1 U7.A6 | length 83.5
  Top Layer w4.7: C547.1@1430.93,3741.9 1430.93,3715.3 1448.29,3697.94 1476.67,3697.94 1477.03,3698.3 U7.A6@1480.47,3698.3
NetC548_1: C548.1 U7.A7 | length 59.5
  Top Layer w4.7: v1@1466.17,3723.37 1475.08,3723.37 U7.A7@1480.47,3717.98
  Bottom Layer w5: C548.1@1429.93,3741.9 C548.1@1434.93,3741.9
  Bottom Layer w10: C548.1@1434.93,3742.9 1446.43,3742.9 v1(1465.15,3724.18)
NetC549_2: C549.2 R564.1 U7.A4 | length 447.5
  Top Layer w4.5: v2@1451.4,3656.86 1474.95,3656.86 U7.A4@1477.03,3658.94
  Top Layer w4.7: U7.A4@1477.03,3658.94 U7.A4@1480.47,3658.94
  Top Layer w8: v1(1476.29,3824.18) 1476.29,3898.54 C549.2@1437.93,3936.9 1492.97,3936.9 1510.61,3919.26 1510.61,3888.5 R564.1@1510.01,3887.9
  L6_INT_2 w8: v2(1447.58,3660.9) 1454.46,3667.79 1454.46,3677.42 1481.35,3704.3 1481.35,3818.6 v1@1477.31,3822.64
NetC559_2: C559.2 C567.2 L8.1 R21.2 | length 281.2
  Top Layer w20: 1189.47,3307.9 L8.1@1222.47,3274.9 ; C567.2@1257.47,3334.44 1257.47,3309.9 L8.1@1222.47,3274.9 ; v4@1284.47,3274.9 L8.1@1222.47,3274.9
  Bottom Layer w20: R21.2@1206.47,3228.3 1251.07,3272.9 v4(1286.47,3272.9)
NetC560_2: C560.2 C566.2 C571.2 C577.2 L9.2 R25.1 U8.38 | length 1096.3
  Top Layer w10: U8.38@775.19,3077.64 806.21,3077.64 810.47,3081.9 810.47,3160.9 v5(809.47,3160.9)
  Top Layer w20: L9.2@319.15,3118.9 350.47,3118.9 v4(352.47,3120.9) ; v4(424.01,3283.9) 424.08,3283.83 522.14,3283.83 R25.1@526.07,3279.9
  L3_INT_1 w20: v4(424.01,3283.9) 750.47,3283.9 809.47,3224.9 v5(809.47,3160.9)
  Bottom Layer w20: C571.2@325.01,3154.9 325.47,3154.9 C571.2@326.47,3153.9 ; C560.2@326.47,3020.44 C577.2@326.47,3087.9 ; C577.2@328.01,3087.9 352.47,3112.36 v4(352.47,3120.9) 352.47,3127.9 C571.2@326.47,3153.9 ; v4@421.27,3286.64 413.22,3286.64 354.21,3286.64 326.47,3258.9 C571.2@326.47,3153.9
NetC574_2: C574.2 C581.2 C583.2 C591.2 L11.1 R27.2 | length 538.8
  Top Layer w20: R27.2@1338.47,3237.5 1355.87,3237.5 1342.47,3224.1 L11.1@1342.47,3079.9 1355.47,3079.9 v4(1390.47,3044.9)
  Bottom Layer w20: v4(1342.47,3111.9) v4@1342.47,3118.9 ; C591.2@1347.93,3002.9 C583.2@1347.93,3074.9 ; C581.2@1347.93,3205.44 C581.2@1347.93,3212.9 C574.2@1347.93,3142.9 C583.2@1347.93,3074.9 ; C591.2@1348.93,3001.9 v4@1390.47,3043.44 ; C583.2@1360.47,3074.9 C583.2@1347.93,3074.9
  other v4: 1343.47,3175.9
NetC589_1: C589.1 C593.1 L12.1 Q511.3 U8.45 | length 372.4
  Top Layer w10: C589.1@827.01,2845.44 827.7,2846.13 v4(829.47,2847.9) 838.07,2856.5 U8.45@838.07,2974.9
  Top Layer w20: L12.1@717.47,2759.9 741.47,2759.9 C589.1@827.7,2846.13
  Bottom Layer w20: Q511.3@796.07,2850.9 v4@837.47,2850.9 ; v4@824.47,2850.9 C593.1@875.47,2850.49
NetC592_1: C592.1 U8.49 | length 89.5
  Top Layer w10: U8.49@916.79,2974.9 916.79,2995.22 v4@932.47,3010.9
  Bottom Layer w10: v4(931.47,3011.9) 959.47,2983.9 C592.1@959.47,2976.49
NetC594_2: C594.2 U8.52 | length 195.6
  Top Layer w10: U8.52@975.83,2974.9 974.97,2974.04 974.97,2940.4 985.45,2929.92 1054.49,2929.92 v4(1073.47,2948.9)
  Bottom Layer w10: v4@1070.47,2947.9 1070.47,2948.9 v4(1073.47,2948.9) ; v4@1076.47,2954.9 1092.47,2970.9 C594.2@1092.47,2994.31
NetC601_2: C601.2 R591.2 U8.47 | length 152.1
  Top Layer w10: v4@880.47,3004.9 877.43,3001.86 U8.47@877.43,2974.9 877.43,2954.4 C601.2@917.47,2914.36
  Bottom Layer w10: v4(876.97,3009.25) 876.97,3008.4 903.47,2981.9 R591.2@903.47,2976.49
NetC624_2: C624.2 QZ500.1 R610.1 U1.D9 | length 434.5
  Top Layer w6: U1.D9@1682.98,2131.93 v2(1698.73,2147.68)
  Bottom Layer w10: v2(1698.73,2147.68) 1718.95,2167.9 1743.47,2167.9 1793.47,2217.9 1856.88,2217.9 1920.09,2281.11 QZ500.1@1966.45,2281.11 C624.2@2055.67,2281.11
NetC627_2: C627.2 C633.2 U1.F9 | length 342.4
  Top Layer w6: U1.F9@1619.99,2131.93 v2(1635.74,2147.68)
  Bottom Layer w8: C633.2@1623.47,2149.9 1633.52,2149.9 v2(1635.74,2147.68) ; v2@1635.47,2147.68 1635.47,2109.9 1644.25,2101.12 1878.71,2101.12 C627.2@1894.47,2085.36
NetC632_2: C632.2 R600.1 U1.V7 | length 433.7
  Top Layer w6: v2(1117.47,2463.9) 1117.47,2487.31 R600.1@1128.47,2498.31 ; v6(1239.92,2207.9) 1239.92,2208.16 1238.96,2209.12 1240.19,2209.12 v6@1240.36,2208.95 ; v6@1240.34,2208.95 1239.93,2209.36 1239.76,2209.36 1239.36,2208.96 1239.36,2207.64 1238.47,2206.75 1238.47,2205.9 1242.04,2202.33 U1.V7@1242.04,2194.92
  L3_INT_1 w6: v2(1117.47,2463.9) 1151.97,2429.4 1162.97,2429.4 1208.47,2383.9 1208.47,2324.9 1243.14,2290.23 1243.14,2279.66 1242.97,2279.49 1242.97,2268.31 1243.14,2268.14 1243.14,2210.57 1238.47,2205.9 1238.47,2206.75 1239.36,2207.64 1239.36,2208.96 1239.76,2209.36 1239.93,2209.36 v6@1240.34,2208.95 ; v6(1239.92,2207.9) 1239.92,2208.16 1238.96,2209.12 1240.19,2209.12 v6@1240.36,2208.95
  Bottom Layer w6: v6(1239.92,2207.9) 1239.92,2208.16 1238.96,2209.12 1240.19,2209.12 v6@1240.36,2208.95 ; v6@1240.34,2208.95 1239.93,2209.36 1239.76,2209.36 1239.36,2208.96 1239.36,2207.64 1238.47,2206.75 1238.47,2205.9 1248.47,2195.9 C632.2@1274.47,2195.9
NetC639_2: C639.2 QZ500.2 R610.2 U1.C9 | length 369
  Top Layer w6: U1.C9@1714.48,2131.93 v2(1730.23,2147.68)
  Bottom Layer w10: v2(1730.23,2147.68) 1753.79,2147.68 1785.68,2179.57 1829.81,2179.57 1849.55,2199.31 R610.2@1889.47,2199.31 1949.83,2199.31 QZ500.2@1966.45,2182.69 ; QZ500.2@1965.66,2181.9 C639.2@2047.88,2181.9
NetC640_2: C640.2 U7.C4 | length 142.6
  Top Layer w3: C640.2@1509.14,3774.47 1502.89,3774.47 1501.62,3773.2 1501.62,3742.69 1509.65,3734.66 1509.65,3694.9 1509.79,3694.9 1515.89,3688.8 1523.46,3688.8 1529.81,3682.45 1529.81,3668.92 U7.C4@1519.83,3658.94
NetC697_2: C697.2 J505.S1 J505.S2 J505.S3 J505.S4 R620.2 | length 657
  Top Layer w10: J505.S4@114.16,4096.35 153.02,4057.49 R620.2@245.47,4057.49 ; J505.S3@114.16,4425.09 155.5,4425.09 J505.S1@232.27,4348.32 ; J505.S2@232.27,4173.12 245.47,4159.92 R620.2@245.47,4057.49 ; C697.2@308.47,4056.49 307.47,4057.49 R620.2@245.47,4057.49
  Bottom Layer w10: J505.S2@232.27,4173.12 J505.S1@232.27,4348.32
NetC766_2: C766.2 J509.S1 J509.S2 J509.S3 J509.S4 R677.2 | length 487.5
  Top Layer w10: J509.S4@111.16,3619.35 152.5,3619.35 J509.S2@229.27,3696.12 300.9,3624.49 C766.2@326.47,3624.49 384.47,3624.49 R677.2@386.47,3626.49 ; J509.S3@111.16,3948.09 187.93,3871.32 J509.S1@229.27,3871.32
NetC881_1: C881.1 L850.1 | length 80.6
  Bottom Layer w5: L850.1@1914.01,3774.9 L850.1@1917.01,3777.9
  Bottom Layer w10: C881.1@1841.93,3774.9 1844.93,3777.9 L850.1@1917.01,3777.9
NetC882_1: C882.1 L750.1 | length 78.3
  Bottom Layer w10: C882.1@1837.93,3836.9 1912.01,3836.9 L750.1@1915.01,3833.9
NetC888_1: C888.1 L610.1 | length 98.1
  Top Layer w20: C888.1@1709.93,3902.9 L610.1@1808.01,3902.9
NetC889_1: C889.1 L666.1 | length 95.1
  Top Layer w20: C889.1@1705.93,4032.9 1794.01,4032.9 L666.1@1799.01,4027.9
NetC905_1: C905.1 U901.2 | length 132.1
  Top Layer w4.7: U901.2@1810.47,443.33 1940.58,443.33 C905.1@1942.01,441.9
NetC905_2: C905.2 C908.1 P_SMA1.2 | length 304.5
  Top Layer w4.7: C908.1@2006.47,312.36 2006.47,439.44 C905.2@2008.93,441.9 P_SMA1.2@2169.47,441.9
  Top Layer w20: C908.1@2006.47,312.36 C908.1@2008.93,314.83 ; P_SMA1.2@2169.47,441.9 P_SMA1.2@2176.47,434.9
NetC913_2: C913.2 L900.1 U901.23 | length 334.4
  Top Layer w20: v3(1327.12,803.6) 1270.82,859.9 L900.1@1248.47,859.9 1248.47,829.75 1316.02,762.2 U901.23@1362.67,762.2
  Bottom Layer w20: v3@1327.54,803.84 1338.01,803.84 C913.2@1373.07,838.9
NetC930_2: C930.2 R901.1 Y100.1 | length 168.2
  Top Layer w20: R901.1@2169.93,562.9 2181.47,574.44 Y100.1@2181.47,635.9 2249.93,635.9 C930.2@2265.47,651.44
NetC931_2: C931.2 R903.2 Y100.3 | length 159.3
  Top Layer w10: R903.2@2014.93,660.9 C931.2@2014.93,727.9 2105.23,727.9 Y100.3@2106.67,726.46
NetCLKOUT2_9: CLKOUT2.9 U7.E4 | length 422.3
  Top Layer w3: U7.E4@1559.19,3658.94 1568.74,3649.39 1568.74,3616.28 1574.93,3610.08 1585,3610.08 1589.05,3606.03 1589.05,3592.69 v20@1598.9,3582.84
  Top Layer w10: CLKOUT2.9@1831.47,3551.9 1843.46,3539.91 v20(1843.46,3518.85)
  L6_INT_2 w3: v20(1599.71,3582.21) 1615,3566.92 1825.18,3566.92 1842.91,3549.19 v20@1842.91,3520.23
NetCLKOUT5_9: CLKOUT5.9 U7.G6 | length 76.5
  Top Layer w3: U7.G6@1603.5,3698.3 U7.G6@1598.55,3698.3 1643.03,3698.3 1653.29,3708.56 CLKOUT5.9@1653.29,3721.09
NetD1_1: D1.1 R501.2 | length 243.1
  Top Layer w15: R501.2@2439.06,4115.9 2559.97,4115.9 2627.97,4183.9 D1.1@2654.01,4183.9
NetD2_1: D2.1 R507.1 | length 79.9
  Top Layer w15: D2.1@260.93,2933.9 R507.1@340.88,2933.9
NetD9_1: D9.1 L12.2 U8.46 | length 558.4
  Top Layer w10: U8.46@857.75,2974.9 857.75,2937.62 866.47,2928.9
  Top Layer w20: D9.1@540.47,2804.9 540.47,2790.9 L12.2@563.38,2767.99 ; L12.2@581.38,2748.99 623.47,2706.9 760.47,2706.9 866.47,2812.9 866.47,2928.9
NetD12_1: D12.1 R206.2 | length 69.8
  Top Layer w10: D12.1@498.47,3800.9 500.47,3802.9 R206.2@567.47,3802.9
NetD12_3: D12.3 R207.2 | length 72.6
  Top Layer w10: D12.3@498.47,3733.98 502.39,3737.9 R207.2@569.47,3737.9
NetD201_2: D201.2 R305.2 | length 165.5
  Top Layer w20: D201.2@78.01,1393.9 78.01,1374.63 v3(129.81,1322.83)
  Bottom Layer w20: v3@131.37,1321.27 168.93,1283.71 R305.2@168.93,1263.9
NetD202_2: D202.2 R308.2 | length 91
  Top Layer w20: v3(58.98,1853.29) 78.01,1872.32 D202.2@78.01,1900.9
  Bottom Layer w20: v3@60.98,1850.56 80.01,1831.53 R308.2@80.01,1822.9
NetD203_2: D203.2 R309.2 | length 141.9
  Top Layer w20: D203.2@79.01,2406.9 79.01,2432.62 v3(112.14,2465.75)
  Bottom Layer w20: v3@112.71,2467.39 113.42,2467.39 R309.2@161.93,2515.9
NetJ6_2: J6.2 U1.G5 | length 982.9
  Top Layer w5: U1.G5@1588.49,2257.92 1588.49,2259.63 v1@1603.73,2274.87
  L3_INT_1 w5: v1(1604.62,2277.04) 1643.28,2315.7 1643.28,2516.88 1653.67,2527.27 1653.67,2527.37 2057.2,2930.9 J6.2@2175.47,2930.9
NetJ6_3: J6.3 U1.C3 | length 872.2
  Top Layer w5: U1.C3@1714.48,2320.91 1714.75,2320.91 v1(1730.46,2336.62)
  L3_INT_1 w5: v1@1730.25,2335.61 1730.25,2369.81 1718.56,2381.5 1694.92,2381.5 1671.54,2404.88 1671.54,2510.6 1991.84,2830.9 J6.3@2175.47,2830.9
NetJ6_4: J6.4 U1.H5 | length 903.8
  Top Layer w5: U1.H5@1557,2257.92 v1@1572.4,2273.32
  L3_INT_1 w5: v1(1573.55,2275.8) 1580.05,2275.8 1597.98,2257.87 1765.61,2257.87 1776.44,2268.7 1776.44,2281.95 1782.79,2288.3 1850.47,2288.3 2109.52,2547.35 v1(2109.52,2617.01) ; v1@2109.26,2617.27 v1@2109.31,2617.32
  Bottom Layer w5: v1(2109.52,2617.01) 2128.98,2636.47 2128.98,2684.41 J6.4@2175.47,2730.9
NetJ6_5: J6.5 U1.G6 | length 798
  Top Layer w5: U1.G6@1588.49,2226.42 1589.37,2226.42 v1(1604.96,2242.01)
  L3_INT_1 w5: v1@1605.66,2240.93 1621.72,2224.87 1765.92,2224.87 1777.96,2236.91 1777.96,2248.62 1787.2,2257.86 1842.59,2257.86 2175.47,2590.74 J6.5@2175.47,2630.9
NetJ505_2: J505.2 L520.2 | length 129.2
  Top Layer w5: J505.2@219.47,4286.31 248.47,4286.31 256.26,4278.51 332.16,4278.51 L520.2@341.55,4287.9
NetJ505_3: J505.3 L520.3 | length 135
  Top Layer w5: J505.3@222.79,4257.4 J505.3@219.47,4260.72 248.47,4260.72 256.26,4268.51 329.43,4268.51 L520.3@341.55,4256.4
NetJ507_14: J507.14 R674.1 U1.A18 | length 3216.4
  Top Layer w4.7: J507.14@795.34,1028.36 v5@844.47,1028.36
  Top Layer w6: U1.A18@1777.47,1848.47 v2(1793.22,1832.72)
  L3_INT_1 w4.7: v5@846.47,1028.01 v5(846.47,1027.9) 957.47,1027.9 964.51,1034.94 964.51,1039.09 954.52,1049.08 954.52,1053.24 960.76,1059.47 964.92,1059.47 989.04,1035.35 993.2,1035.35 999.44,1041.58 999.44,1045.74 987.37,1057.8 975.31,1069.87 975.31,1074.02 981.55,1080.26 985.71,1080.26 997.77,1068.2 1009.83,1056.14 1013.99,1056.14 1020.23,1062.37 1020.23,1066.53 1008.16,1078.59 996.1,1090.66 996.1,1094.81 1002.34,1101.05 1006.49,1101.05 1018.56,1088.99 1030.62,1076.92 1034.78,1076.92 1041.01,1083.16 1041.01,1087.32 1028.95,1099.38 1016.89,1111.45 1016.89,1115.6 1023.13,1121.84 1027.28,1121.84 1039.35,1109.78 1051.41,1097.71 1055.57,1097.71 1061.8,1103.95 1061.8,1108.11 1037.68,1132.23 1037.68,1136.39 1043.91,1142.63 1048.07,1142.63 1060.14,1130.57 1072.2,1118.5 1076.36,1118.5 1082.59,1124.74 1082.59,1128.9 1070.53,1140.96 1058.47,1153.02 1058.47,1157.18 1064.7,1163.42 1068.86,1163.42 1092.99,1139.29 1097.15,1139.29 1103.38,1145.53 1103.38,1149.69 1091.32,1161.75 1079.26,1173.81 1079.26,1177.97 1085.49,1184.21 1089.65,1184.21 1101.71,1172.14 1113.78,1160.08 1117.93,1160.08 1124.17,1166.32 1124.17,1170.47 1112.11,1182.54 1100.04,1194.6 1100.04,1198.76 1106.28,1205 1110.44,1205 1122.5,1192.93 1134.57,1180.87 1138.72,1180.87 1144.96,1187.11 1144.96,1191.26 1132.9,1203.33 1120.83,1215.39 1120.83,1219.55 1127.07,1225.78 1131.23,1225.78 1143.29,1213.72 1155.35,1201.66 1159.51,1201.66 1165.75,1207.89 1165.75,1212.05 1153.69,1224.12 1141.62,1236.18 1141.62,1240.34 1147.86,1246.57 1152.02,1246.57 1164.08,1234.51 1176.14,1222.45 1180.3,1222.45 1186.54,1228.68 1186.54,1232.84 1174.47,1244.9 1162.41,1256.97 1162.41,1261.13 1168.65,1267.36 1172.81,1267.36 1196.93,1243.24 1201.09,1243.24 1207.33,1249.47 1207.33,1253.63 1195.26,1265.69 1183.2,1277.76 1183.2,1281.91 1189.44,1288.15 1193.59,1288.15 1205.66,1276.09 1217.72,1264.02 1221.88,1264.02 1228.12,1270.26 1228.12,1274.42 1203.99,1298.55 1203.99,1302.7 1210.23,1308.94 1214.38,1308.94 1226.45,1296.88 1238.51,1284.81 1242.67,1284.81 1248.9,1291.05 1248.9,1295.21 1236.84,1307.27 1224.78,1319.33 1224.78,1323.49 1231.01,1329.73 1235.17,1329.73 1247.24,1317.67 1259.3,1305.6 1263.46,1305.6 1269.69,1311.84 1269.69,1316 1257.63,1328.06 1245.57,1340.12 1245.57,1344.28 1251.8,1350.52 1255.96,1350.52 1268.02,1338.45 1280.09,1326.39 1284.25,1326.39 1290.48,1332.63 1290.48,1336.79 1278.42,1348.85 1266.36,1360.91 1266.36,1365.07 1272.59,1371.31 1276.75,1371.31 1300.88,1347.18 1305.03,1347.18 1311.27,1353.42 1311.27,1357.57 1299.21,1369.64 1287.14,1381.7 1287.14,1385.86 1293.38,1392.1 1297.54,1392.1 1309.6,1380.03 1321.67,1367.97 1325.82,1367.97 1332.06,1374.21 1332.06,1378.36 1307.93,1402.49 1307.93,1406.65 1314.17,1412.88 1318.33,1412.88 1330.39,1400.82 1342.45,1388.76 1346.61,1388.76 1352.85,1394.99 1352.85,1399.15 1340.79,1411.22 1328.72,1423.28 1328.72,1427.44 1334.96,1433.67 1339.12,1433.67 1351.18,1421.61 1363.24,1409.55 1367.4,1409.55 1373.64,1415.78 1373.64,1419.94 1361.57,1432 1349.51,1444.07 1349.51,1448.23 1355.75,1454.46 1359.91,1454.46 1371.97,1442.4 1382.45,1431.92 1386.61,1431.92 1392.85,1438.15 1392.85,1442.31 1384.44,1450.71 1384.44,1454.87 1469.47,1539.9 1611.47,1539.9 1649.95,1578.38 1649.95,1680.62 1650.04,1680.71 1650.04,1709.29 1664.65,1723.9 1664.65,1724.04 1683.47,1742.86 1683.47,1837.05 1695.32,1848.9 1777.04,1848.9 v2(1793.22,1832.72)
  Bottom Layer w8: R674.1@680.47,831.49 777.47,928.49 777.47,958.9 v5(846.47,1027.9)